# Altium PCB GRLV_double_Rail_v0.3.PcbDoc
Units mil, origin at the board's own origin, x right, y up, seen from the top; angles counter-clockwise.
Board outline 6470 x 7260 mil, 2 copper layers (Top Layer, Bottom Layer); 173 components, 86 nets, 452 pads, 6 vias.
Unrouted connection lines stored in the file: 2.
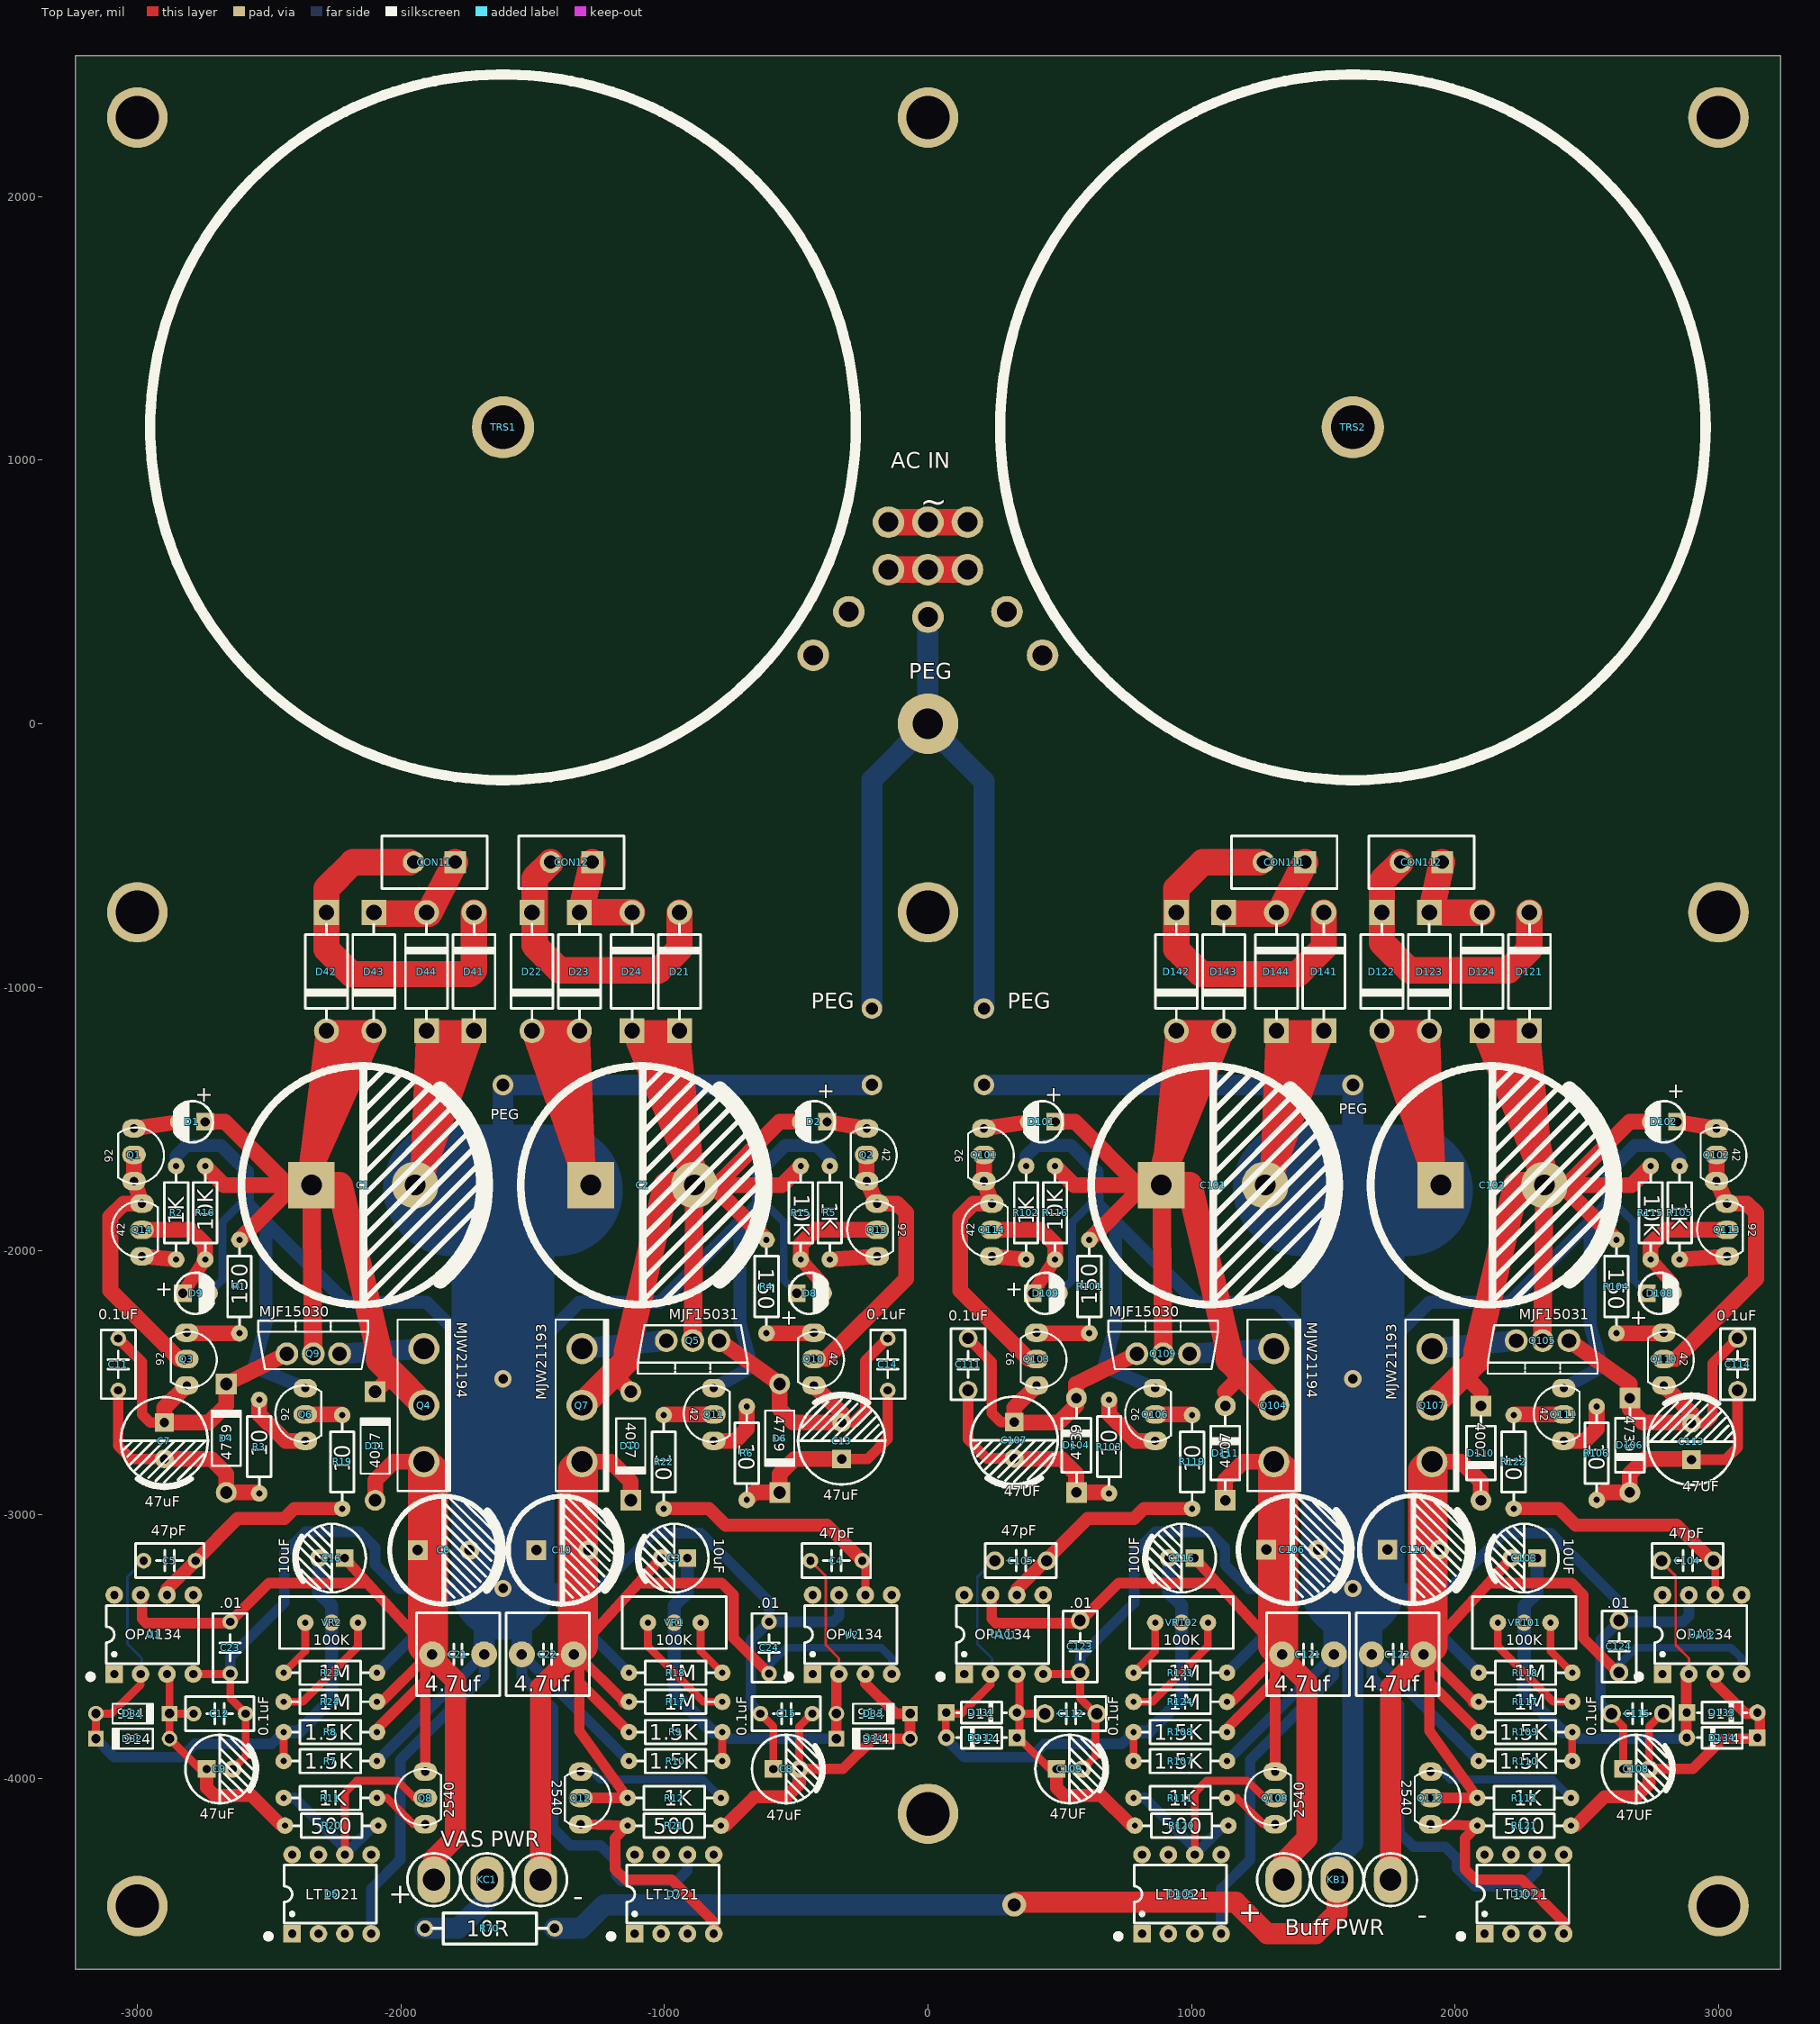
[diagram p0: Top Layer view]
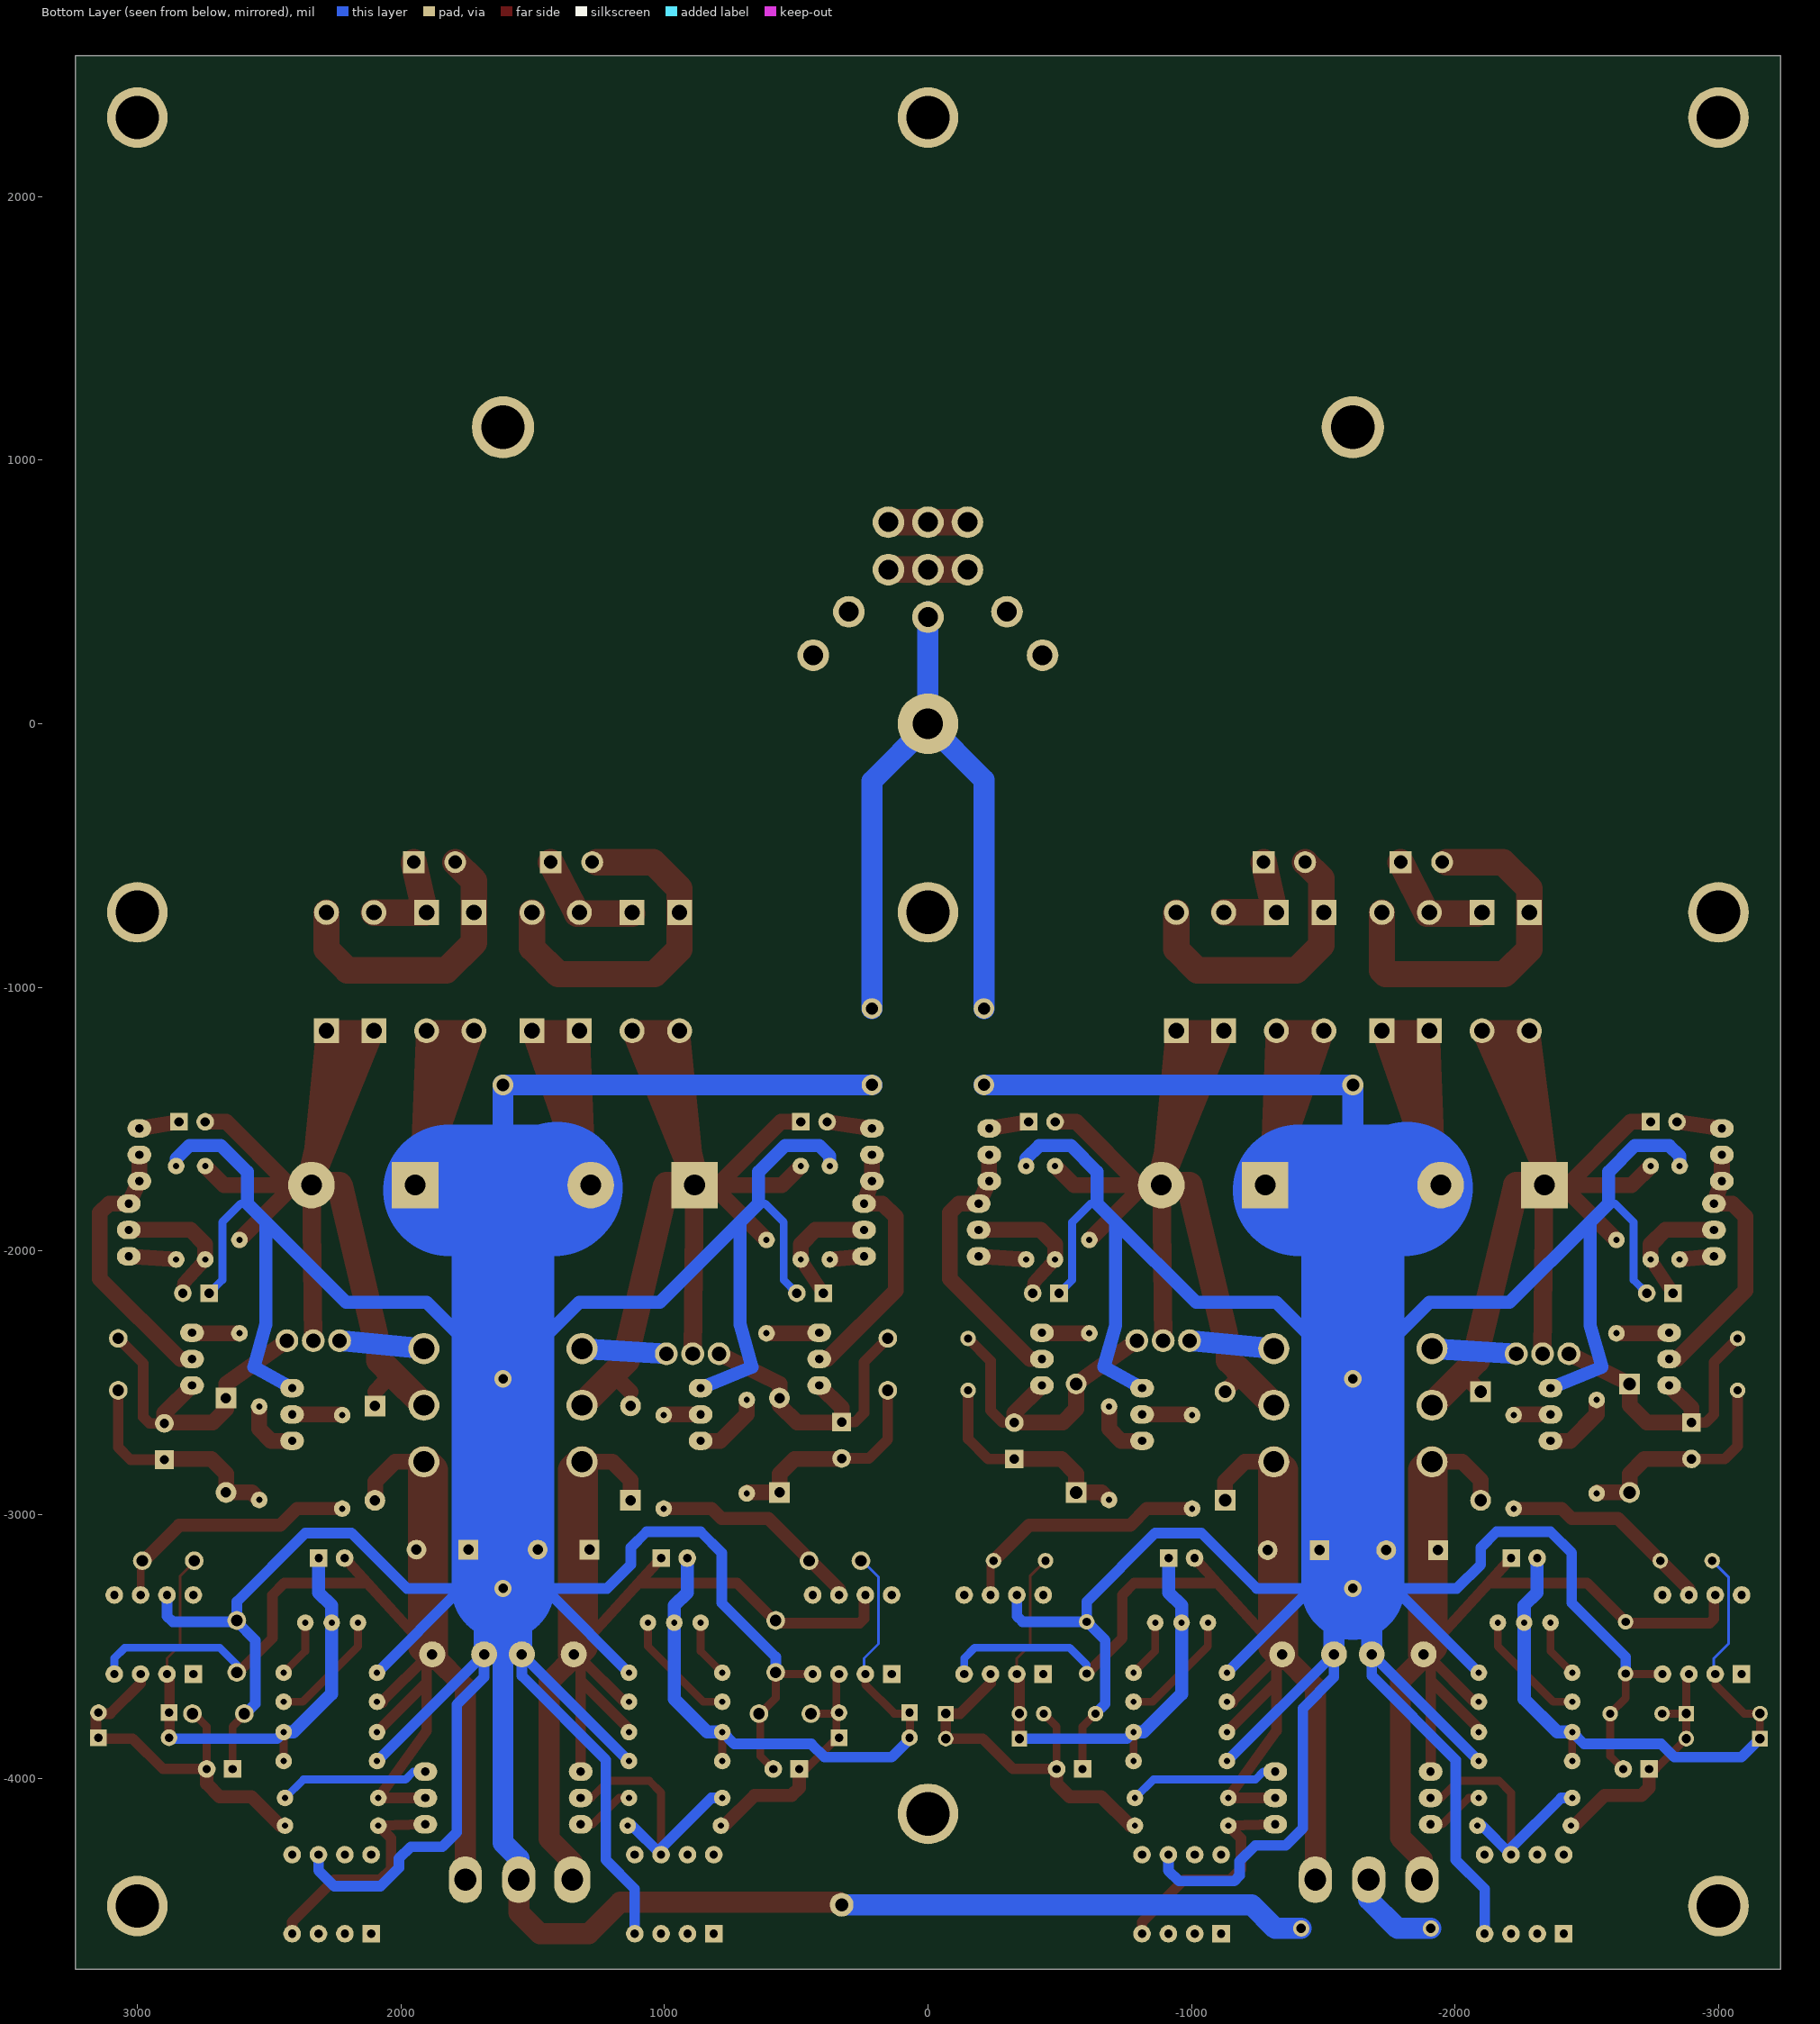
[diagram p1: Bottom Layer view, seen from below]
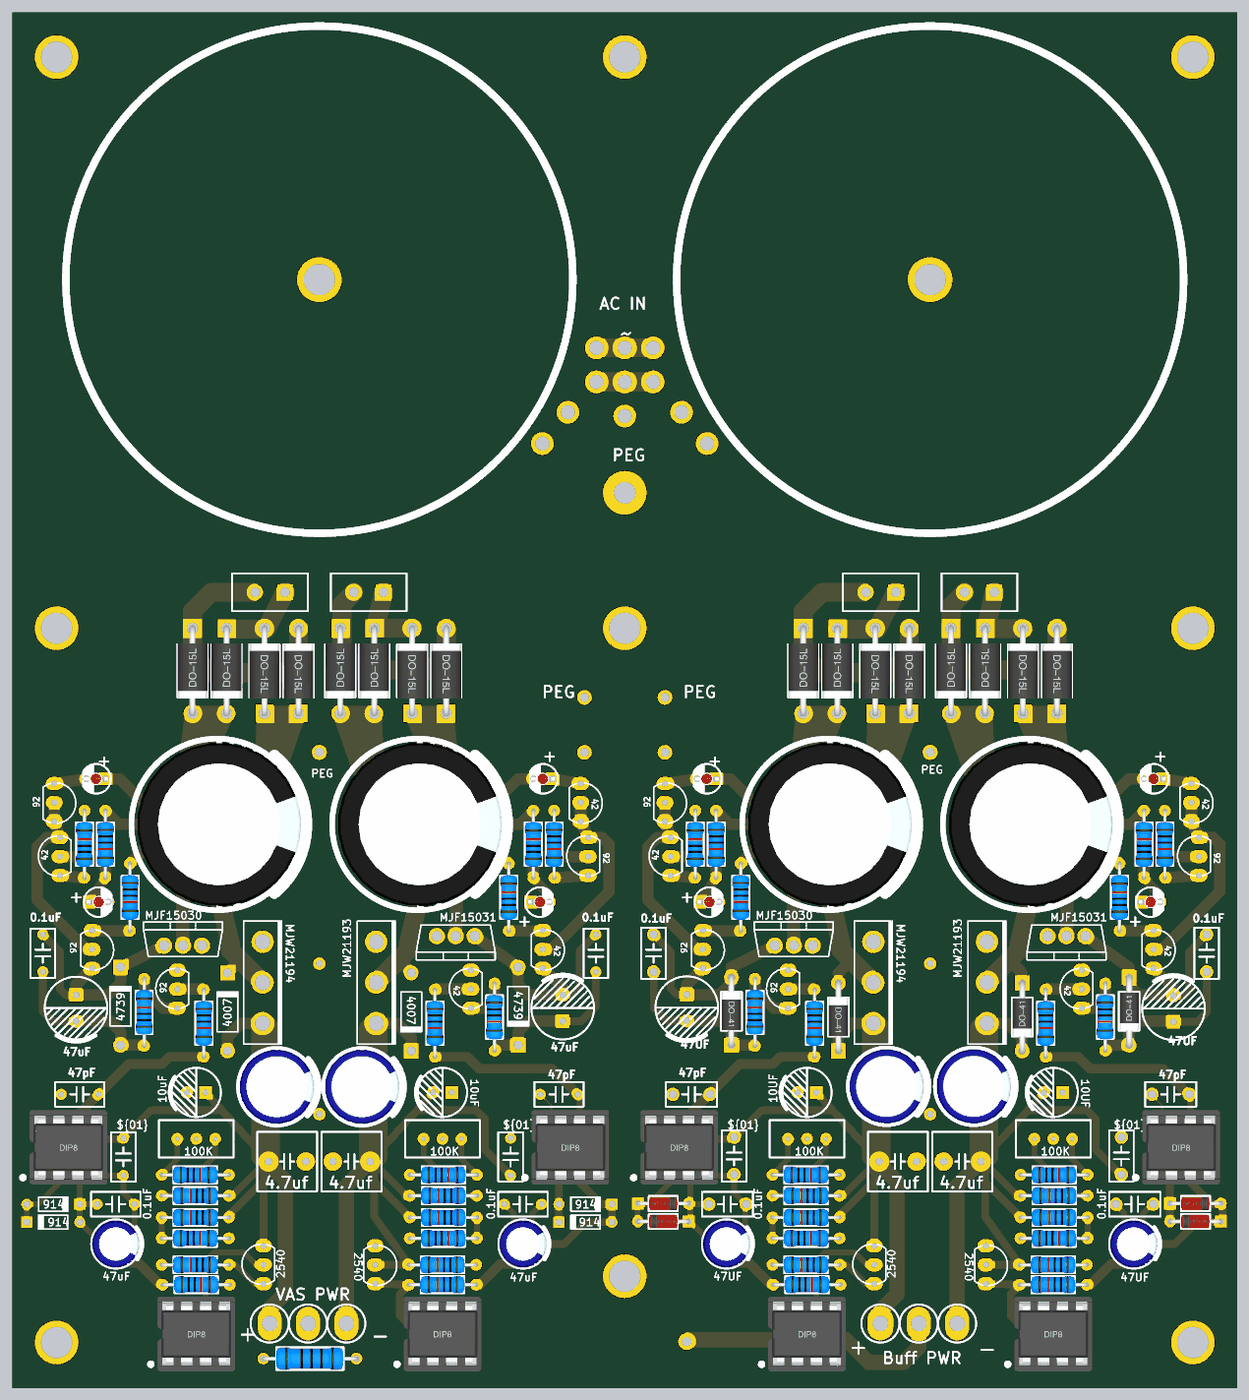
[diagram p2: 3D render of the assembled board from above, using the file's embedded part models]

## Layer stack, top to bottom
Top Solder: solder mask 0.4, Solder Resist, Dk 3.5
Top Layer: signal copper 2.8
Dielectric 1: dielectric 12.6, FR-4, Dk 4.8
Bottom Layer: signal copper 2.8
Bottom Solder: solder mask 0.4, Solder Resist, Dk 3.5

## Board outline
-3235,-4725 -3235,2535 3235,2535 3235,-4725

## Design rules (kind name [scope] priority, off if disabled: settings)
Clearance [All] p1: gap=10 ignorepadtopadclearanceinfootprint=FALSE except(0: Arc-Hole Track-Hole SMDPad-Hole THPad-Hole Via-Hole Fill-Hole Poly-Hole Region-Hole Text-Hole)
PlaneClearance [All] p1: clearance=30
PlaneConnect [All] p1: planeconnectstyle=Relief reliefexpansion=20 reliefentries=4 reliefconductorwidth=20 reliefairgap=30
PolygonConnect [All] p1: thpad.connectstyle=Relief thpad.reliefconductorwidth=20 thpad.reliefentries=4 thpad.polygonreliefangle="45 Angle" thpad.airgapwidth=20 smdpad.connectstyle=Relief smdpad.reliefconductorwidth=20 smdpad.reliefentries=4 smdpad.polygonreliefangle="90 Angle" smdpad.airgapwidth=20 via.connectstyle=Relief via.reliefconductorwidth=20 via.reliefentries=4 via.polygonreliefangle="45 Angle" via.airgapwidth=20
RoomDefinition GRLV_double_Rail_v0.3_P1 [InComponentClass('GRLV_double_Rail_v0.3_P1')] p1: confinementstyle=ConfineIn formatcopy=TRUE lockcomponents=FALSE outline -3197.5,-4720 -27.5,-4720 -27.5,-400 -3197.5,-400
RoomDefinition GRLV_double_Rail_v0.3_P2 [InComponentClass('GRLV_double_Rail_v0.3_P2')] p2: confinementstyle=ConfineIn formatcopy=TRUE lockcomponents=FALSE outline 27.5,-4720 3197.5,-4720 3197.5,-400 27.5,-400
RoutingVias [All] p1: holewidth=28 width=50 viastyle="Through Hole" minholewidth=28 minwidth=50 maxholewidth=28 maxwidth=50
SolderMaskExpansion [All] p1: expansion=4
Width [All] p1: maxlimit=700 minlimit=10 preferedwidth=80
28 further rules are at their usual default settings.

## Classes and differential pairs
component class GRLV_double_Rail_v0.3_P1: C1 C2 C3 C4 C5 C6 C7 C8 C9 C10 C11 C12 C13 C14 C15 C16 C21 C22 C23 C24 CON11 CON12 D1 D2 D4 D5 D6 D7 D8 D9 D10 D11 D21 D22 D23 D24 D31 D32 D33 D34 D41 D42 D43 D44 KC1 Q1 Q2 Q3 Q4 Q5 Q6 Q7 Q8 Q9 Q10 Q11 Q12 Q13 Q14 R1 R2 R3 R4 R5 R6 R7 R8 R9 R10 R11 R12 R15 R16 R17 R18 R19 R20 R21 R22 R23 R24 R70 TRS1 U1 U2 VR1 VR2
component class GRLV_double_Rail_v0.3_P2: C101 C102 C103 C104 C105 C106 C107 C108 C109 C110 C111 C112 C113 C114 C115 C116 C121 C122 C123 C124 CON111 CON112 D101 D102 D104 D105 D106 D107 D108 D109 D110 D111 D121 D122 D123 D124 D131 D132 D133 D134 D141 D142 D143 D144 KB1 Q101 Q102 Q103 Q104 Q105 Q106 Q107 Q108 Q109 Q110 Q111 Q112 Q113 Q114 R101 R102 R103 R104 R105 R106 R107 R108 R109 R110 R111 R112 R115 R116 R117 R118 R119 R120 R121 R122 R123 R124 TRS2 U101 U102 VR101 VR102

## Components (designator, comment, footprint, x,y, rotation, side; value= is the part's Value field where it differs from the comment)
C1 "4700UF/35V" "CAP 10*22*31.5 - BK" -2142.5,-1750 r0 top
C2 "4700UF/35V" "CAP 10*22*31.5 - BK" -1082.5,-1750 r0 top
C3 "10uF" "CAP 2.5*6.3*7" -962.5,-3165 r180 top
C4 "47pF" "CBB 6.3*6.3*5"#1 -347.5,-3175 r180 top
C5 "47pF" "CBB 6.3*6.3*5"#1 -2877.5,-3175 r180 top
C6 "220UF/35V" "CAP 5.0*10*12.5" -1837.5,-3135 r0 top
C7 "47uF" "CAP 3.5*8*11.5" -2897.5,-2720 r270 top
C8 "47uF" "CAP 2.5*6.3*11.2" -537.5,-3965 r0 top
C9 "47uF" "CAP 2.5*6.3*11.2" -2687.5,-3965 r0 top
C10 "220UF/35V" "CAP 5.0*10*12.5" -1387.5,-3135 r0 top
C11 "0.1uF" "CBB 6.3*6.3*5"#1 -3072.5,-2430 r270 top
C12 "0.1uF" "CBB 6.3*6.3*5"#1 -2687.5,-3755 r0 top
C13 "47uF" "CAP 3.5*8*11.5" -327.5,-2720 r90 top
C14 "0.1uF" "CBB 6.3*6.3*5"#1 -152.5,-2430 r90 top
C15 "0.1uF" "CBB 6.3*6.3*5"#1 -537.5,-3755 r180 top
C16 "10uF" "CAP 2.5*6.3*7" -2262.5,-3165 r180 top
C21 "4.7uf" "CBB 7.2*7.2*13" -1782.5,-3530 r0 top
C22 "4.7uf" "CBB 7.2*7.2*13" -1442.5,-3530 r0 top
C23 ".01" "CBB 6.3*6.3*5"#1 -2647.5,-3505 r90 top value=0.01uF
C24 ".01" "CBB 6.3*6.3*5"#1 -602.5,-3505 r270 top value=0.01uF
C101 "4700UF/35V" "CAP 10*22*31.5 - BK" 1082.5,-1750 r0 top
C102 "4700UF/35V" "CAP 10*22*31.5 - BK" 2142.5,-1750 r0 top
C103 "10UF" "CAP 2.5*6.3*7" 2262.5,-3165 r180 top
C104 "47pF" "CBB 6.3*6.3*5"#2 2882.5,-3175 r180 top
C105 "47pF" "CBB 6.3*6.3*5"#2 352.5,-3175 r180 top
C106 "220UF/35V" "CAP 5.0*10*12.5" 1382.5,-3132.83 r0 top
C107 "47UF" "CAP 3.5*8*11.5" 327.5,-2717.83 r270 top
C108 "47UF" "CAP 2.5*6.3*11.2" 2687.5,-3965 r0 top
C109 "47UF" "CAP 2.5*6.3*11.2" 537.5,-3965 r0 top
C110 "220UF/35V" "CAP 5.0*10*12.5" 1842.5,-3132.83 r0 top
C111 "0.1uF" "CBB 6.3*6.3*5"#2 152.5,-2430 r270 top
C112 "0.1uF" "CBB 6.3*6.3*5"#2 542.5,-3755 r0 top
C113 "47UF" "CAP 3.5*8*11.5" 2897.5,-2722.83 r90 top
C114 "0.1uF" "CBB 6.3*6.3*5"#2 3072.5,-2430 r90 top
C115 "0.1uF" "CBB 6.3*6.3*5"#2 2692.5,-3755 r180 top
C116 "10UF" "CAP 2.5*6.3*7" 962.5,-3165 r180 top
C121 "4.7uf" "CBB 7.2*7.2*13" 1442.5,-3530 r0 top
C122 "4.7uf" "CBB 7.2*7.2*13" 1782.5,-3530 r0 top
C123 ".01" "CBB 6.3*6.3*5"#2 577.5,-3500 r90 top value=0.01uF
C124 ".01" "CBB 6.3*6.3*5"#2 2622.5,-3500 r270 top value=0.01uF
CON11 "AC220-2" HX4.0-2XS -1872.5,-525 r180 top
CON12 "AC220-2" HX4.0-2XS -1352.5,-525 r180 top
CON111 "AC220-2" HX4.0-2XS 1352.5,-525 r180 top
CON112 "AC220-2" HX4.0-2XS 1872.5,-525 r180 top
D1 "+" "LED 3MM-R" -2792.5,-1510 r180 top
D2 "+" "LED 3MM-R" -432.5,-1510 r180 top
D4 "4739" DO-41#1 -2662.5,-2710 r90 top
D5 "LT1021" DIP8-300_MH -2262.5,-4440 r90 top
D6 "4739" DO-41#1 -562.5,-2710 r270 top
D7 "LT1021" DIP8-300_MH -962.5,-4440 r90 top
D8 "+" "LED 3MM-R" -447.5,-2160 r0 top
D9 "+" "LED 3MM-R" -2777.5,-2160 r0 top
D10 "4007" DO-41#1 -1127.5,-2740 r270 top
D11 "4007" DO-41#1 -2097.5,-2740 r90 top
D21 "VS-HFA08TB60-M3" DO-15XL -942.5,-940 r90 top
D22 "VS-HFA08TB60-M3" DO-15XL -1502.5,-940 r270 top
D23 "VS-HFA08TB60-M3" DO-15XL -1322.5,-940 r270 top
D24 "VS-HFA08TB60-M3" DO-15XL -1122.5,-940 r90 top
D31 "914" DO-35#1 -3017.5,-3755 r0 top
D32 "914" DO-35#1 -3017.5,-3850 r180 top
D33 "914" DO-35#1 -207.5,-3755 r0 top
D34 "914" DO-35#1 -207.5,-3850 r180 top
D41 "VS-HFA08TB60-M3" DO-15XL -1722.5,-940 r90 top
D42 "VS-HFA08TB60-M3" DO-15XL -2282.5,-940 r270 top
D43 "VS-HFA08TB60-M3" DO-15XL -2102.5,-940 r270 top
D44 "VS-HFA08TB60-M3" DO-15XL -1902.5,-940 r90 top
D101 "+" "LED 3MM-R" 432.5,-1510 r180 top
D102 "+" "LED 3MM-R" 2792.5,-1510 r180 top
D104 "4739" DO-41#2 563.44,-2736.77 r90 top
D105 "LT1021" DIP8-300_MH 962.5,-4440 r90 top
D106 "4739" DO-41#2 2663.44,-2736.77 r270 top
D107 "LT1021" DIP8-300_MH 2262.5,-4440 r90 top
D108 "+" "LED 3MM-R" 2777.5,-2160 r0 top
D109 "+" "LED 3MM-R" 447.5,-2160 r0 top
D110 "4007" DO-41#2 2098.44,-2766.77 r270 top
D111 "4007" DO-41#2 1128.44,-2766.77 r90 top
D121 "VS-HFA08TB60-M3" DO-15XL 2282.5,-940 r90 top
D122 "VS-HFA08TB60-M3" DO-15XL 1722.5,-940 r270 top
D123 "VS-HFA08TB60-M3" DO-15XL 1902.5,-940 r270 top
D124 "VS-HFA08TB60-M3" DO-15XL 2102.5,-940 r90 top
D131 "914" DO-35#2 203.56,-3751.34 r0 top
D132 "914" DO-35#2 203.56,-3846.34 r180 top
D133 "914" DO-35#2 3013.56,-3751.34 r0 top
D134 "914" DO-35#2 3013.56,-3846.34 r180 top
D141 "VS-HFA08TB60-M3" DO-15XL 1502.5,-940 r90 top
D142 "VS-HFA08TB60-M3" DO-15XL 942.5,-940 r270 top
D143 "VS-HFA08TB60-M3" DO-15XL 1122.5,-940 r270 top
D144 "VS-HFA08TB60-M3" DO-15XL 1322.5,-940 r90 top
KB1 "KCBuff_PowerPin" KCBuff_PowerPin_M2.0 1552.5,-4385 r90 top
KC1 "KCInputVas_PowerPin" KCIn_VAS_PowerPin_M2.0 -1672.5,-4385 r90 top
Q1 "92" TO92A -3012.5,-1535 r0 top
Q2 "42" TO92A -232.5,-1535 r0 top
Q3 "92" TO92A -2812.5,-2310 r0 top
Q4 "MJW21194" TO247V#1 -1912.5,-2370 r270 top
Q5 "MJF15031" TO220V -792.5,-2340 r180 top
Q6 "92" TO92A -2362.5,-2720 r180 top
Q7 "MJW21193" TO247V#1 -1312.5,-2370 r270 top
Q8 "2540" TO92A -1907.5,-4175 r180 top
Q9 "MJF15030" TO220V -2432.5,-2390 r0 top
Q10 "42" TO92A -432.5,-2310 r0 top
Q11 "42" TO92A -812.5,-2720 r180 top
Q12 "2540" TO92A -1317.5,-3975 r0 top
Q13 "92" TO92A -192.5,-2020 r180 top
Q14 "42" TO92A -2982.5,-2020 r180 top
Q101 "92" TO92A 212.5,-1535 r0 top
Q102 "42" TO92A 2992.5,-1535 r0 top
Q103 "92" TO92A 412.5,-2310 r0 top
Q104 "MJW21194" TO247V#2 1312.5,-2585 r270 top
Q105 "MJF15031" TO220V 2432.5,-2340 r180 top
Q106 "92" TO92A 862.5,-2720 r180 top
Q107 "MJW21193" TO247V#2 1912.5,-2585 r270 top
Q108 "2540" TO92A 1317.5,-4175 r180 top
Q109 "MJF15030" TO220V 792.5,-2390 r0 top
Q110 "42" TO92A 2792.5,-2310 r0 top
Q111 "42" TO92A 2412.5,-2720 r180 top
Q112 "2540" TO92A 1907.5,-3975 r0 top
Q113 "92" TO92A 3032.5,-2020 r180 top
Q114 "42" TO92A 242.5,-2020 r180 top
R1 "150" "RS 1/4W" -2612.5,-2135 r270 top
R2 "1K" "RS 1/4W" -2852.5,-1855 r90 top
R3 "10" "RS 1/4W" -2537.5,-2742.17 r90 top
R4 "150" "RS 1/4W" -612.5,-2135 r90 top
R5 "1K" "RS 1/4W" -372.5,-1855 r270 top
R6 "10" "RS 1/4W" -687.5,-2767.17 r270 top
R7 "1.5K" "RS 1/4W" -2267.5,-3935 r0 top
R8 "1.5K" "RS 1/4W" -2267.5,-3825 r180 top
R9 "1.5K" "RS 1/4W" -957.5,-3825 r180 top
R10 "1.5K" "RS 1/4W" -957.5,-3935 r0 top
R11 "1K" "RS 1/4W" -2267.5,-4075 r180 top
R12 "1K" "RS 1/4W" -962.5,-4075 r180 top
R15 "10K" "RS 1/4W" -482.5,-1855 r90 top
R16 "10K" "RS 1/4W" -2742.5,-1855 r270 top
R17 "1M" "RS 1/4W" -957.5,-3710 r180 top
R18 "1M" "RS 1/4W" -957.5,-3600 r0 top
R19 "10" "RS 1/4W" -2222.5,-2800 r270 top
R20 "500" "RS 1/4W" -2262.5,-4180 r0 top
R21 "500" "RS 1/4W" -962.5,-4180 r180 top
R22 "10" "RS 1/4W" -1002.5,-2800 r270 top
R23 "1M" "RS 1/4W" -2267.5,-3600 r0 top
R24 "1M" "RS 1/4W" -2267.5,-3710 r180 top
R70 "10R" "RS 1/2W" -1662.5,-4570 r180 top
R101 "150" "RS 1/4W" 612.5,-2135 r270 top
R102 "1K" "RS 1/4W" 372.5,-1855 r90 top
R103 "10" "RS 1/4W" 687.5,-2742.17 r90 top
R104 "150" "RS 1/4W" 2612.5,-2135 r90 top
R105 "1K" "RS 1/4W" 2852.5,-1855 r270 top
R106 "10" "RS 1/4W" 2537.5,-2767.17 r270 top
R107 "1.5K" "RS 1/4W" 957.5,-3935 r0 top
R108 "1.5K" "RS 1/4W" 957.5,-3825 r180 top
R109 "1.5K" "RS 1/4W" 2267.5,-3825 r180 top
R110 "1.5K" "RS 1/4W" 2267.5,-3935 r0 top
R111 "1K" "RS 1/4W" 957.5,-4075 r180 top
R112 "1K" "RS 1/4W" 2262.5,-4075 r180 top
R115 "10K" "RS 1/4W" 2742.5,-1855 r90 top
R116 "10K" "RS 1/4W" 482.5,-1855 r270 top
R117 "1M" "RS 1/4W" 2267.5,-3710 r180 top
R118 "1M" "RS 1/4W" 2267.5,-3600 r0 top
R119 "10" "RS 1/4W" 1002.5,-2800 r270 top
R120 "500" "RS 1/4W" 962.5,-4180 r0 top
R121 "500" "RS 1/4W" 2262.5,-4180 r180 top
R122 "10" "RS 1/4W" 2222.5,-2800 r270 top
R123 "1M" "RS 1/4W" 957.5,-3600 r0 top
R124 "1M" "RS 1/4W" 957.5,-3710 r180 top
TRS1 "TRANSFORMER" TRANS_BLOCK_m4_68mm -1612.5,1125 r0 top
TRS2 "TRANSFORMER" TRANS_BLOCK_m4_68mm 1612.5,1125 r0 top
U1 "OPA134" DIP8-300_MH -2937.5,-3455 r90 top
U2 "OPA134" DIP8-300_MH -287.5,-3455 r90 top
U101 "OPA134" DIP8-300_MH 287.5,-3455 r90 top
U102 "OPA134" DIP8-300_MH 2937.5,-3455 r90 top
VR1 "100K" "RS 1/2W-VR" -962.5,-3410 r180 top
VR2 "100K" "RS 1/2W-VR" -2262.5,-3410 r180 top
VR101 "100K" "RS 1/2W-VR" 2262.5,-3410 r180 top
VR102 "100K" "RS 1/2W-VR" 962.5,-3410 r180 top

## Footprints (in the part's own frame and the unit in brackets; to place one, negate y for a bottom-side part, rotate by r counter-clockwise, add the part's x,y. Pads: shape width x height; smd on the part's side, far side on the other; paste and mask are expansions set on the pad)
"CAP 2.5*6.3*7" [mm] "脚距2.5mm直径6.3mm高度7mm"
  rect 1.7x1.7 hole 0.8: 1(-1.25,0)
  round 1.7 hole 0.8: 2(1.25,0)
  silkscreen extent -3.3,-3.3 3.56,3.3, body extent -3.15,-3.15 3.16,3.15, height 7.03
"CAP 2.5*6.3*11.2" [mm] "脚距2.5mm直径6.3mm高度11.2mm"
  rect 1.7x1.7 hole 0.8: 1(-1.25,0)
  round 1.7 hole 0.8: 2(1.25,0)
  silkscreen extent -3.3,-3.3 3.56,3.3, body extent -3.15,-3.15 3.16,3.15, height 11.23
"CAP 3.5*8*11.5" [mm] "脚距3.5mm直径8mm高度11.5mm"
  rect 1.8x1.8 hole 0.9: 1(-1.75,0)
  round 1.8 hole 0.9: 2(1.75,0)
  silkscreen extent -4.2,-4.2 4.5,4.2, body extent -4,-4 4.01,4, height 11.53
"CAP 5.0*10*12.5" [mm] "脚距5mm直径10mm高度12.5mm"
  rect 1.9x1.9 hole 1: 1(-2.5,0)
  round 1.9 hole 1: 2(2.5,0)
  silkscreen extent -5.2,-5.2 5.64,5.2, body extent -5,-5.01 5.01,4.99, height 12.55
"CAP 10*22*31.5 - BK" [mm] "脚距10mm直径22mm高度31.5mm"
  rect 4.5x4.5 hole 2: 1(-5,0)
  round 4.5 hole 2: 2(5,0)
  silkscreen extent -11.74,-11.51 11.74,11.49, body extent -11,-11 11.01,11, height 31.54
"CBB 6.3*6.3*5"#1 [mm] "脚距5mm高6.3mm厚3mm"
  round 1.5 hole 0.8: 1(-2.5,0) 2(2.5,0)
  silkscreen extent -3.3,-1.65 3.3,1.65, body extent -3.15,-1.5 3.15,1.5, height 6.8
"CBB 6.3*6.3*5"#2 [mm] "脚距5mm高6.3mm厚3mm"
  round 1.8 hole 1.1: 1(-2.5,0) 2(2.5,0)
  silkscreen extent -3.43,-1.65 3.43,1.65, body extent -3.15,-1.5 3.15,1.5, height 6.8
"CBB 7.2*7.2*13" [mm] "脚距5mm高13mm厚7.2mm"
  round 2.5 hole 1: 1(-2.5,0) 2(2.5,0)
  silkscreen extent -4,-4 4,4, body extent -4,-4 4,4, height 17.53
DIP8-300_MH [mm] "带底座 9.4*7.6*3.8(长宽高）"
  rect 1.7x1.7 hole 0.8: 1(-3.81,3.81)
  round 1.7 hole 0.8: 2(-3.81,1.27) 3(-3.81,-1.27) 4(-3.81,-3.81) 5(3.81,-3.81) 6(3.81,-1.27) 7(3.81,1.27) 8(3.81,3.81)
  silkscreen extent -4.32,-4.32 2.79,6.35, body extent -5,-5.19 5,5.19, height 7.7
DO-15XL [mm] "4*11.4mm(直径，脚距）1.5孔径"
  rect 2.4x2.4 hole 1.5: 1(-5.7,0)
  round 2.4 hole 1.5: 2(5.7,0)
  silkscreen extent -4.57,-2.03 4.57,2.03, body extent -6.1,-2 6.1,2, height 4.05
DO-35#1 [mm] "Diode, Axial; Body 3.8 x 1.9 mm (LxDia. max), Lead Dia. 0.53 mm (max)"
  round 1.5 hole 0.9: 1(-3.55,0)
  rect 1.5x1.5 hole 0.9: 2(3.55,0)
  silkscreen extent -1.95,-0.95 2.05,0.95
DO-35#2 [mm] "1.8*6.8mm(直径，脚距）"
  rect 1.6x1.6 hole 0.8: 1(-3.4,0)
  round 1.6 hole 0.8: 2(3.4,0)
  silkscreen extent -2.41,-1.02 2.41,1.02, body extent -3.65,-0.9 3.65,0.9, height 1.85
DO-41#1 [mm] "Diode, Axial; Body 5.2 x 2.7 mm (LxDia. max), Lead Dia. 0.86 mm (max)"
  round 2 hole 1.2: 1(-5.23,0)
  rect 2x2 hole 1.2: 2(5.23,0)
  silkscreen extent -2.65,-1.4 2.75,1.4
DO-41#2 [mm] "2.6*9.1mm(直径，脚距）"
  rect 2x2 hole 1: 1(-4.55,0)
  round 2 hole 1: 2(4.55,0)
  silkscreen extent -3.56,-1.4 3.56,1.4, body extent -4.92,-1.29 4.98,1.31, height 2.65
HX4.0-2XS [mm]
  rect 2.1x2.1 hole 1.3: 1(-2,0)
  round 2.1 hole 1.3: 2(2,0)
  silkscreen extent -5.08,-2.54 5.08,2.54
KCBuff_PowerPin_M2.0 [mm]
  oval 4.5x3.5 hole 2.1: 1(0,5.15)
  oval 4.5x3.2 hole 2.1: 2(0,-5.15) 3(0,0)
  silkscreen extent -2.55,-7.7 2.55,7.7
KCIn_VAS_PowerPin_M2.0 [mm]
  oval 4.5x3.2 hole 2.1: 1(0,5.143) 2(0,-5.143) 3(0,0)
  silkscreen extent -2.55,-7.69 2.55,7.69
"LED 3MM-R" [mm] "红色3mm直插LED"
  rect 1.7x1.7 hole 0.9: 1(-1.27,0)
  round 1.7 hole 0.9: 2(1.27,0)
  silkscreen extent -2.01,-2 1.72,1.98, body extent -1.95,-1.95 1.64,1.95, height 5.55
"RS 1/2W" [mil] "直插色环电阻，脚距12.5mm，直径3mm"
  round 62 hole 35.43: 1(-246.06,0) 2(246.06,0)
  silkscreen extent -217,-59 217,59, body extent -256,-59 256,59, height 122
"RS 1/2W-VR" [mm] "直插3脚顶调可调电阻，脚距2.54mm，长10mm*宽5mm*高10mm"
  round 1.6 hole 0.6: 1(-2.54,0) 2(2.54,0) 3(0,0)
  silkscreen extent -5,-2.5 5,2.5
"RS 1/4W" [mm] "直插色环电阻，脚距9mm，直径2.3mm"
  round 1.6 hole 0.6: 1(-4.5,0) 2(4.5,0)
  silkscreen extent -3.68,-1.14 3.68,1.14, body extent -4.72,-1.16 4.73,1.16, height 2.32
TO92A [mil]
  oval 90x70 hole 31.5: 1(0,0) 2(0,-100) 3(0,-200)
  silkscreen extent -60,-209 114,4
TO220V [mm]
  round 2.2 hole 1.397: 1(0,0) 2(2.54,0) 3(5.08,0)
  silkscreen extent -2.75,-1.48 7.83,3.18
TO247V#1 [mm]
  round 3 hole 2.032: 1(0,0) 2(5.461,0) 3(10.922,0)
  silkscreen extent -2.79,-2.54 13.72,2.54
TO247V#2 [mm]
  round 3 hole 2.032: 1(-5.461,0) 2(0,0) 3(5.461,0)
  silkscreen extent -8.25,-2.54 8.25,2.54
TRANS_BLOCK_m4_68mm [mm] "Transformer 4.0mm screw  68mm Diameter"
  round 6 hole 4.2: 1(0,0)
  silkscreen extent -34,-34 34,34

## Part data
C1 C2 C3 C6 C7 C8 C9 C10 C13 C16 C101 C102 C103 C106 C107 C108 C109 C110 C113 C116: library part C-CAP, "直插电解电容", BOM名称=直插电解电容, 学习资源=www.ooocke.com, 版权归属=源创客
C4 C5 C11 C12 C14 C15 C23 C24 C104 C105 C111 C112 C114 C115 C123 C124: library part C-CBB, "CBB电容", BOM名称=CBB电容, 学习资源=www.ooocke.com, 版权归属=源创客
C21 C22 C121 C122: library part C-MKS, "MKS薄膜电容"
D1 D2 D8 D9 D101 D102 D108 D109: library part LED, "直插式LED"
D4 D6 D104 D106: library part 1N4739, "9.1V/1W稳压管"
D5 D7 D105 D107: library part LT1021-10-2P, "10V Precision Reference 2 Pin Config"
D10 D11 D110 D111: library part 1N4007, "整流二极管", BOM名称=整流二极管, 学习资源=www.ooocke.com, 版权归属=源创客
D21 D22 D23 D24 D41 D42 D43 D44 D121 D122 D123 D124 D141 D142 D143 D144: "Ultrafast Soft Recovery Diado 8A 600V"
D31 D32 D33 D34 D131 D132 D133 D134: library part 1N914, "高速开关管 1V/0.25W"
KB1: "King Cello Buffer Stage"
KC1: "King Cello Input Stage and VAS"
Q1 Q3 Q6 Q13 Q101 Q103 Q106 Q113: library part KSP92/93, "High Voltage PNP Transistor"
Q2 Q10 Q11 Q14 Q102 Q110 Q111 Q114: library part KSP42/43, "High Voltage NPN Transistor"
Q4 Q9 Q104 Q109: "Power NPN Transistor"
Q5 Q7 Q105 Q107: "Power PNP Transistor"
Q8 Q12 Q108 Q112: library part DN2540, "N沟道耗尽型DMOS场效应管 400V/150ma"
R1 R2 R3 R4 R5 R6 R7 R8 R9 R10 R11 R12 R15 R16 R17 R18 R19 R20 R21 R22 R23 R24 R70 R101 R102 R103 R104 R105 R106 R107 R108 R109 R110 R111 R112 R115 R116 R117 R118 R119 R120 R121 R122 R123 R124: library part R-CRR, "直插色环电阻", BOM名称=色环电阻, 学习资源=www.ooocke.com, 版权归属=源创客
TRS1 TRS2: "Transformer"
U1 U2 U101 U102: library part OPA134PA
VR1 VR2 VR101 VR102: library part VR-W, "直插可调电阻-顶调"

## Free pads (board coordinates)
  round 230 hole 165: 2(-3000,-4485) 2(-3000,-715) 2(-3000,2300) 2(0,-4135) 2(0,-715) 2(0,2300) 2(3000,-4485) 2(3000,-715) 2(3000,2300)
  round 230 hole 115: 2(0,0)
  round 90 hole 50: 2(327.5,-4480)
  round 120 hole 75: 3(-150,585) 3(-150,765) 4(0,585) 4(0,765) 5(150,585) 5(150,765) 6(-435,260) 6(-300,425) 6(0,405) 6(300,425) 6(435,260)
  round 78 hole 46: 7(212.5,-1080) 8(-212.5,-1080) 9(-212.5,-1370) 10(212.5,-1370)

## Via types
v1: diameter 66, hole 36, Top Layer to Bottom Layer, 4 vias
v2: diameter 80, hole 48, Top Layer to Bottom Layer, 2 vias

## Nets (pads, with @x,y where several pads share a name; then routed paths per layer and width w, separated by ;. In a path a pad name is that pad's centre, name@x,y a point inside that pad or via, vN(x,y) a via of type N, cw(c..) or ccw(c..) an arc to the next point about the centre after c; other vN are vias at no path point)
GND: C1.2 C2.1 C6.2 C8.1 C9.2 C10.1 C12.2 C15.2 C21.2 C22.1 C23.1 C24.1 C101.2 C102.1 C106.2 C108.1 C109.2 C110.1 C112.2 C115.2 C121.2 C122.1 C123.1 C124.1 D5.4 D7.6 D8.1 D9.2 D22.2 D23.2 D41.1 D44.1 D105.4 D107.6 D108.1 D109.2 D122.2 D123.2 D141.1 D144.1 KB1.3 pad.2@0,0 pad.2@327.5,-4480 pad.6@0,405 pad.7 pad.8 pad.9 pad.10 Q6.3 Q11.3 Q106.3 Q111.3 R2.2 R5.1 R7.2 R10.1 R18.1 R23.2 R70.1 R102.2 R105.1 R107.2 R110.1 R118.1 R123.2 U1.4 U2.7 U101.4 U102.7 | length 55732.8
  Top Layer w30: U1.4 -2649.07,-3605 C23.1 -2647.5,-3696.57 C12.2 -2589.07,-3915.79 C9.2 ; C15.2 -586.71,-3804.21 C8.1 ; U101.4 575.93,-3605 577.5,-3603.43 577.5,-3696.57 635.93,-3755 635.93,-3915.79 C109.2 ; C115.2@2589.07,-3755 2638.29,-3804.21 C108.1
  Top Layer w80: pad.2@327.5,-4480 337.5,-4470 1167.5,-4470 1287.5,-4590 1472.5,-4590 1552.5,-4510 KB1.3 ; C1.2@-1925.96,-1750 -1855.69,-1170.08 -1855,-1164.41 ; C1.2@-1925.96,-1750 -1790,-1164.41 ; C1.2@-1925.96,-1750 D41.1 -1790,-1164.41 ; C1.2@-1925.96,-1750 D44.1 -1855,-1164.41 ; -1855,-1164.41 -1790,-1164.41 ; -1455,-1164.41 -1395,-1164.41 ; -1455,-1164.41 D22.2 C2.1@-1299.04,-1750 ; -1455,-1164.41 C2.1@-1299.04,-1750 ; -1395,-1164.41 -1393.1,-1175.98 C2.1@-1299.04,-1750 ; -1395,-1164.41 D23.2 C2.1@-1299.04,-1750 ; C101.2@1299.04,-1750 1364.47,-1169.14 D144.1@1365,-1164.41 ; C101.2@1299.04,-1750 1430,-1164.41 ; C101.2@1299.04,-1750 D141.1 1430,-1164.41 ; C101.2@1299.04,-1750 D144.1 D144.1@1365,-1164.41 ; D144.1@1365,-1164.41 1430,-1164.41 ; 1775,-1164.41 1845,-1164.41 ; 1775,-1164.41 D122.2 C102.1@1925.96,-1750 ; 1775,-1164.41 C102.1@1925.96,-1750 ; 1845,-1164.41 D123.2 C102.1@1925.96,-1750 ; 1845,-1164.41 1846.08,-1172.21 C102.1@1925.96,-1750
  Bottom Layer w30: D9.2 -2677.5,-2110 -2677.5,-1890 -2607.5,-1820 -2582.5,-1820 ; C23.1 C23.1@-2640.65,-3603.43 ; -642.5,-1820 -617.5,-1820 -547.5,-1890 -547.5,-2110 D8.1 ; D109.2 547.5,-2110 547.5,-1890 617.5,-1820 642.5,-1820 ; C123.1@577.5,-3603.43 C123.1@584.35,-3603.43 ; 2582.5,-1820 2607.5,-1820 2677.5,-1890 2677.5,-2110 D108.1
  Bottom Layer w40: C23.1 -2647.5,-3540 -2442.5,-3335 -2442.5,-3145 -2362.5,-3065 -2157.5,-3065 -2097.5,-3125 -2097.5,-3190 -2007.5,-3280 -1797.5,-3280 ; D5.4 -2112.5,-4420 -2002.5,-4310 -2002.5,-3930 -1684.07,-3611.57 C21.2 -1685.33,-3530 R7.2 ; R23.2 -1797.5,-3307.17 -1797.5,-3280 ; R10.1 -1539.67,-3530 C22.1 -1540.93,-3616.57 -1422.5,-3735 -1422.5,-4190 -1357.5,-4255 -1242.5,-4255 -1182.5,-4315 -1182.5,-4370 -1162.5,-4390 -952.5,-4390 -912.5,-4350 D7.6 ; R18.1 -1454.67,-3280 ; C15.2 -672.5,-3718.43 -672.5,-3476.57 C24.1 ; U2.7 -337.5,-3385 -359.07,-3406.57 C24.1 ; C123.1@577.5,-3603.43 C123.1 577.5,-3540 782.5,-3335 782.5,-3145 862.5,-3065 1067.5,-3065 1127.5,-3125 1127.5,-3190 1217.5,-3280 1427.5,-3280 ; D105.4 1112.5,-4420 1222.5,-4310 1222.5,-3930 1540.93,-3611.57 C121.2 1539.67,-3530 R107.2 ; R123.2 1427.5,-3307.17 1427.5,-3280 ; R110.1 1685.33,-3530 C122.1 1684.07,-3616.57 1787.5,-3720 1787.5,-4205 1842.5,-4260 1962.5,-4260 2007.5,-4305 2007.5,-4340 2077.5,-4410 2252.5,-4410 2312.5,-4350 D107.6 ; R118.1 1770.33,-3280 ; C115.2@2589.07,-3755 2552.5,-3718.43 2552.5,-3476.57 C124.1@2622.5,-3406.57 ; U102.7 2887.5,-3385 2865.93,-3406.57 C124.1@2622.5,-3406.57 ; -1797.5,-3280 v1(-1612.5,-3280) -1454.67,-3280 ; -1454.67,-3280 -1247.5,-3280 -1037.5,-3070 -862.5,-3070 -602.5,-3330 C24.1 ; 1427.5,-3280 v1(1612.5,-3280) 1770.33,-3280 ; 1770.33,-3280 1977.5,-3280 2187.5,-3070 2362.5,-3070 2622.5,-3330 C124.1 C124.1@2622.5,-3406.57
  Bottom Layer w50: R2.2 -2852.5,-1640 -2812.5,-1600 -2682.5,-1600 -2582.5,-1700 -2582.5,-1820 -2512.5,-1890 ; Q6.3 -2557.5,-2440 -2512.5,-2280 -2512.5,-1890 ; Q11.3 -667.5,-2440 -712.5,-2280 -712.5,-1890 ; R5.1 -372.5,-1650 -422.5,-1600 -542.5,-1600 -642.5,-1700 -642.5,-1820 -712.5,-1890 ; R102.2 372.5,-1640 412.5,-1600 542.5,-1600 642.5,-1700 642.5,-1820 712.5,-1890 ; Q106.3 667.5,-2440 712.5,-2280 712.5,-1890 ; Q111.3 2557.5,-2440 2512.5,-2280 2512.5,-1890 ; R105.1 2852.5,-1650 2802.5,-1600 2682.5,-1600 2582.5,-1700 2582.5,-1820 2512.5,-1890 ; -2512.5,-1890 -2207.5,-2195 -1902.5,-2195 v1(-1612.5,-2485) -1322.5,-2195 -1017.5,-2195 -712.5,-1890 ; 712.5,-1890 1017.5,-2195 1322.5,-2195 v1(1612.5,-2485) 1902.5,-2195 2207.5,-2195 2512.5,-1890
  Bottom Layer w80: C21.2 -1684.07,-3351.57 v1(-1612.5,-3280) -1540.93,-3351.57 C22.1 ; -1642.5,-1770 -1612.5,-1740 v2(-1612.5,-1370) pad.9 ; R70.1 -1317.5,-4570 -1227.5,-4480 pad.2@327.5,-4480 ; pad.8 -212.5,-212.5 pad.2@0,0 ; pad.6@0,425 0,405 pad.2@0,0 ; pad.10 v2(1612.5,-1370) 1612.5,-1740 1582.5,-1770 ; pad.7 212.5,-217.5 0,-5 pad.2@0,0 ; C121.2 1540.93,-3351.57 v1(1612.5,-3280) ; KB1.3 1552.5,-4305 1612.5,-4245 v1(1612.5,-3280) ; C122.1 1684.07,-3351.57 v1(1612.5,-3280)
  Bottom Layer w90: -1623.6,-2690 -1612.5,-2690 -1601.4,-2690 ; 1601.4,-2690 1612.5,-2690 1623.6,-2690
  Bottom Layer w390: v1(-1612.5,-3280) -1612.5,-2690 v1(-1612.5,-2485) -1612.5,-1800 ; v1(1612.5,-3280) 1612.5,-2690 v1(1612.5,-2485) 1612.5,-1800
  Bottom Layer w500: -1817.5,-1760 -1807.5,-1770 -1642.5,-1770 ; -1612.5,-1800 -1642.5,-1770 ; -1407.5,-1770 -1642.5,-1770 ; 1407.5,-1760 1417.5,-1770 1582.5,-1770 ; 1612.5,-1800 1582.5,-1770 ; 1817.5,-1770 1582.5,-1770
NetC1_1: C1.1 D1.1 D11.2 D42.2 D43.2 Q4.2 Q9.2 R1.1 R16.1 | length 5597.7
  Top Layer w60: R16.1 -2670.33,-1750 C1.1@-2427.5,-1750 ; D1.1 -2667.5,-1510 C1.1@-2427.5,-1750 ; R1.1 -2427.5,-1772.83 C1.1@-2427.5,-1750 ; C1.1 -2359.04,-1750 C1.1@-2427.5,-1750 ; D11.2 -2030,-2467.5
  Top Layer w70: C1.1 -2339.34,-1750.74 -2339.34,-1750.91 -2339.34,-1751.01 -2339.34,-1751.22 -2339.29,-1755.85 Q9.2
  Top Layer w80: C1.1@-2357.69,-1737.69 -2357.81,-1738.77 -2357.99,-1740.39 -2358.41,-1744.25 -2358.8,-1747.87 C1.1@-2359.04,-1750 ; C1.1@-2352.9,-1724.28 -2353.44,-1726.53 C1.1@-2354.25,-1729.92 ; C1.1@-2345.55,-1713.18 -2346.74,-1716.41 -2348.51,-1721.25 -2348.94,-1722.43 -2356.71,-1743.64 C1.1@-2359.04,-1750 ; C1.1@-2359.04,-1750 -2357.84,-1745.29 C1.1@-2353.49,-1728.22 ; C1.1@-2359.04,-1750 -2356.9,-1743.88 C1.1@-2344.08,-1707.07 ; C1.1@-2359.04,-1750 -2357.98,-1745.56 -2354.84,-1732.39 C1.1@-2354.25,-1729.92 ; C1.1@-2354.25,-1729.92 C1.1@-2353.49,-1728.22 ; C1.1@-2354.25,-1729.92 D42.2 -2210,-1164.41 ; C1.1@-2353.49,-1728.22 -2214.41,-1181.74 -2210,-1164.41 ; C1.1@-2353.49,-1728.22 C1.1@-2344.08,-1707.07 ; C1.1@-2344.08,-1707.07 D43.2 -2155,-1164.41 ; C1.1@-2344.08,-1707.07 -2155,-1164.41 ; -2210,-1164.41 -2155,-1164.41
  Top Layer w100: C1.1 -2232.5,-1750 ; C1.1@-2260,-1755 -2237.5,-1755 -2232.5,-1750 ; Q4.2 -2030,-2467.5 -2082.5,-2415 -2082.5,-2380 -2232.1,-1751.69 -2232.5,-1750
NetC2_2: C2.2 D2.2 D10.1 D21.1 D24.1 Q5.2 Q7.2 R4.2 R15.2 | length 5479.8
  Top Layer w60: -1192.5,-2465 D10.1 ; C2.2 -865.96,-1750 C2.2@-802.5,-1750 ; R4.2 -802.5,-1767.83 C2.2@-802.5,-1750 ; R15.2 -554.67,-1750 C2.2@-802.5,-1750 ; D2.2 -562.5,-1510 C2.2@-802.5,-1750
  Top Layer w70: Q5.2 C2.2
  Top Layer w80: -1075,-1164.41 -1015,-1164.41 ; -1075,-1164.41 D24.1 C2.2 C2.2@-893,-1674.25 ; -1075,-1164.41 C2.2@-893,-1674.25 ; -1015,-1164.41 -1010.59,-1181.74 -897.79,-1624.95 ; -1015,-1164.41 D21.1 -897.79,-1624.95 ; -897.79,-1624.95 -867.16,-1745.29 -865.96,-1750 -868.19,-1743.77 C2.2@-893,-1674.25 ; -897.79,-1624.95 C2.2@-893,-1674.25
  Top Layer w100: Q7.2 -1192.5,-2465 -1142.5,-2415 -1142.5,-2380 -992.5,-1750 C2.2
NetC3_1: C3.1 C4.2 D33.1 D34.2 R9.1 R10.2 U2.2 VR1.3 | length 2055
  Top Layer w10: C4.2 -387.5,-3233.43 -387.5,-3495 -337.5,-3545 U2.2
  Top Layer w30: R10.2 R9.1
  Top Layer w40: D34.2 D33.1 -347.26,-3614.76 U2.2
  Bottom Layer w40: R9.1 -755.33,-3850 D34.2
  Bottom Layer w50: C3.1 -913.29,-3295.79 -962.5,-3345 VR1.3 -962.5,-3680 -817.5,-3825 R9.1
NetC3_2: C3.2 C10.2 C22.2 C24.2 D10.2 KC1.2 Q7.3 Q12.2 R9.2 R12.2 R17.2 U2.4 | length 5849.5
  Top Layer w40: C22.2 -1312.5,-3495.32 -1097.89,-3259.64 ; C22.2@-1332.5,-3530 R17.2@-1152.5,-3710 ; C22.2@-1322.5,-3551.57 -1322.5,-3637.17 ; Q12.2 R12.2 -1322.5,-3820 -1322.5,-3637.17 ; R9.2 -1322.5,-3637.17 ; C3.2 -1097.89,-3259.64 ; C24.2 -737.5,-3468.43 -737.5,-3305 -782.86,-3259.64 -1097.89,-3259.64
  Top Layer w50: C22.2@-1332.5,-3530 C22.2 C22.2@-1322.5,-3551.57 ; R17.2@-1152.5,-3710 R17.2
  Top Layer w60: Q7.3 -1202.5,-2800 -1127.5,-2875 D10.2
  Top Layer w80: KC1.2 -1470.02,-3655.94 C22.2
  Top Layer w120: C22.2 -1344.07,-2831.57 Q7.3 -1312.5,-3495.32 -1312.5,-3498.43 C22.2
  Bottom Layer w30: C24.2 -602.5,-3570 -537.5,-3505 -177.5,-3505 -137.5,-3545 U2.4
NetC4_1: C4.1 R22.2 U2.6 | length 970.2
  Top Layer w30: C4.1 -237.5,-3186.57 U2.6
  Top Layer w50: R22.2 -830.33,-2977.17 -767.5,-3040 -384.07,-3040 C4.1
NetC5_1: C5.1 R19.2 U1.6 | length 813.4
  Top Layer w50: U1.6 -2887.5,-3283.43 C5.1 -2619.07,-3015 -2442.5,-3015 -2404.67,-2977.17 R19.2
NetC5_2: C5.2 C16.2 D31.1 D32.2 R7.1 R8.2 U1.2 VR2.3 | length 2508.9
  Top Layer w30: D32.2 D31.1 -3097.5,-3755 -2987.5,-3645 U1.2 ; R7.1 R8.2
  Bottom Layer w10: U1.2@-2982.5,-3605 -2982.5,-3545 -3037.5,-3490 -3037.5,-3236.57 C5.2
  Bottom Layer w40: D32.2 -3087.26,-3920 -2832.5,-3920 -2782.5,-3870 -2489.67,-3870 R8.2
  Bottom Layer w50: R8.2 -2387.5,-3825 -2262.5,-3700 VR2.3 -2262.5,-3345 -2311.71,-3295.79 C16.2
NetC6_1: C6.1 C16.1 C21.1 C23.2 D11.1 KC1.1 Q4.3 Q8.3 R8.1 R24.1 U1.7 | length 5205.6
  Top Layer w30: C23.2@-2652.5,-3411.57 C23.2
  Top Layer w40: U1.7@-2982.5,-3305 -2982.5,-3395.79 -2966.71,-3411.57 C23.2@-2652.5,-3411.57 ; C23.2 -2500.57,-3259.64 -2127.11,-3259.64 ; C16.1 -2127.11,-3259.64 ; R8.1 -2090.33,-3812.83 -1907.5,-3630 ; R24.1 -2072.5,-3710 C21.1@-1907.5,-3545 ; Q8.3 -1907.5,-3630 ; C21.1@-1907.5,-3540 C21.1@-1907.5,-3545 ; -2127.11,-3259.64 -1912.5,-3495.32 C21.1 -1892.5,-3530 C21.1@-1907.5,-3545 ; -1907.5,-3630 C21.1@-1907.5,-3545
  Top Layer w60: D11.1 -2097.5,-2870 -2027.5,-2800 Q4.3
  Top Layer w80: C21.1@-1892.5,-3530 -1792.5,-3630 -1792.5,-4225 -1874.98,-4307.48 KC1.1
  Top Layer w120: C21.1@-1912.5,-3498.43 -1912.5,-3495.32 Q4.3 -1880.93,-2831.57 C21.1 C21.1@-1912.5,-3498.43
NetC7_1: C7.1 C11.1 D4.2 Q3.3 Q9.1 | length 1199.9
  Top Layer w40: C11.1 -2982.5,-2421.58 -2982.5,-2620 -2951.4,-2651.1 C7.1
  Top Layer w60: Q3.3 -2897.5,-2595 C7.1 -2728.6,-2651.1 -2662.5,-2585 D4.2 Q9.1
NetC7_2: C7.2 C11.2 D4.1 R3.1 | length 862.4
  Top Layer w40: C11.2 -3072.5,-2740 -3023.6,-2788.9 C7.2
  Top Layer w60: C7.2 -2718.6,-2788.9 -2662.5,-2845 D4.1 -2540.93,-2915.91 R3.1
NetC8_2: C8.2 C15.1 D33.2 D34.1 R21.1 U2.3 | length 1464.8
  Top Layer w30: C8.2 -488.29,-3804.21 C15.1
  Top Layer w40: C8.2 -322.5,-3965 -207.5,-3850 D34.1 D33.2 -122.5,-3755 -237.5,-3640 U2.3
  Top Layer w50: R21.1 -767.5,-4180 -657.5,-4070 -537.5,-4070 -488.29,-4020.79 C8.2
NetC9_1: C9.1 C12.1 D31.2 D32.1 R20.1 U1.3 | length 955
  Top Layer w30: U1.3 -2877.74,-3614.76 D31.2 ; C12.1 D31.2 ; C9.1 -2762.74,-3965 D32.1 D31.2
  Top Layer w50: C9.1 -2736.71,-4035.79 -2707.5,-4065 -2567.5,-4065 -2457.5,-4175 R20.1@-2439.67,-4175
NetC13_1: C13.1 C14.1 D6.2 R6.2 | length 856.8
  Top Layer w40: C13.1 -228.6,-2788.9 -152.5,-2712.8 C14.1
  Top Layer w60: R6.2 -659.07,-2915.91 D6.2 -562.5,-2845 -506.4,-2788.9 C13.1
NetC13_2: C13.2 C14.2 D6.1 Q5.1 Q10.3 | length 1236.9
  Top Layer w40: C13.2 -283.6,-2651.1 -237.5,-2605 -237.5,-2416.57 C14.2
  Top Layer w60: Q5.1 D6.1 -562.5,-2600 -511.4,-2651.1 C13.2 -327.5,-2615 Q10.3
NetC101_1: C101.1 D101.1 D111.2 D142.2 D143.2 Q104.2 Q109.2 R101.1 R116.1 | length 5512.7
  Top Layer w60: R116.1 554.67,-1750 C101.1@797.5,-1750 ; D101.1 557.5,-1510 C101.1@797.5,-1750 ; R101.1 797.5,-1772.83 C101.1@797.5,-1750 ; C101.1 865.96,-1750 C101.1@797.5,-1750 ; 1127.5,-2534.09 1195,-2467.5
  Top Layer w70: C101.1 Q109.2
  Top Layer w80: D142.2@949.8,-1165.28 D142.2@949.9,-1164.41 ; D142.2@949.94,-1164.1 D142.2@949.9,-1164.41 ; D143.2@1114.7,-1161.1 1114.53,-1161.59 1111.71,-1164.41 1060,-1164.41 ; D143.2 C101.1 C101.1@893.81,-1665.97 ; C101.1@893.81,-1665.97 867.91,-1744.12 865.96,-1750 867.16,-1745.29 897.79,-1624.95 ; C101.1@893.81,-1665.97 897.79,-1624.95 ; C101.1@893.81,-1665.97 1060,-1164.41 ; 897.79,-1624.95 1010.59,-1181.74 1015,-1164.41 ; 897.79,-1624.95 D142.2 D142.2@949.9,-1164.41 ; D142.2@949.9,-1164.41 1015,-1164.41 ; 1015,-1164.41 1060,-1164.41
  Top Layer w100: C101.1 992.5,-1750 1142.5,-2380 1142.5,-2415 1195,-2467.5 Q104.2
NetC102_2: C102.2 D102.2 D110.1 D121.1 D124.1 Q105.2 Q107.2 R104.2 R115.2 | length 5474.1
  Top Layer w60: 2032.5,-2465 2097.5,-2534.09 ; C102.2 2359.04,-1750 C102.2@2422.5,-1750 ; R104.2 2422.5,-1767.83 C102.2@2422.5,-1750 ; R115.2 2670.33,-1750 C102.2@2422.5,-1750 ; D102.2 2662.5,-1510 C102.2@2422.5,-1750
  Top Layer w70: Q105.2 C102.2
  Top Layer w80: 2160,-1164.41 2220,-1164.41 ; 2160,-1164.41 D124.1 C102.2 C102.2@2331.48,-1668.93 ; 2160,-1164.41 C102.2@2331.48,-1668.93 ; 2220,-1164.41 2223.34,-1178.46 2325.73,-1609.74 ; 2220,-1164.41 D121.1 2325.73,-1609.74 ; 2325.73,-1609.74 2357.98,-1745.58 2359.04,-1750 2357,-1744 C102.2@2331.48,-1668.93 ; 2325.73,-1609.74 C102.2@2331.48,-1668.93
  Top Layer w100: Q107.2 2032.5,-2465 2082.5,-2415 2082.5,-2380 2232.5,-1750 C102.2
NetC103_1: C103.1 C104.2 D133.1 D134.2 R109.1 R110.2 U102.2 VR101.3 | length 2055
  Top Layer w10: C104.2@2779.07,-3175 2837.5,-3233.43 2837.5,-3495 2887.5,-3545 U102.2
  Top Layer w30: R110.2 R109.1
  Top Layer w40: D134.2@2877.74,-3850 2877.74,-3614.76 U102.2
  Bottom Layer w40: R109.1 2469.67,-3850 D134.2@2877.74,-3850
  Bottom Layer w50: C103.1 2311.71,-3295.79 2262.5,-3345 VR101.3 2262.5,-3680 2407.5,-3825 R109.1
NetC103_2: C103.2 C110.2 C122.2 C124.2 D110.2 KB1.2 Q107.3 Q112.2 R109.2 R112.2 R117.2 U102.4 | length 5849.4
  Top Layer w40: C122.2 1912.5,-3495.32 2127.11,-3259.64 ; C122.2@1892.5,-3530 R117.2@2072.5,-3710 ; C122.2@1902.5,-3551.57 1902.5,-3637.17 ; Q112.2 R112.2 1902.5,-3820 1902.5,-3637.17 ; R109.2 1902.5,-3637.17 ; C103.2 2127.11,-3259.64 ; C124.2@2622.5,-3603.43 2487.5,-3468.43 2487.5,-3305 2442.14,-3259.64 2127.11,-3259.64
  Top Layer w50: C122.2@1892.5,-3530 C122.2 C122.2@1902.5,-3551.57 ; R117.2@2072.5,-3710 R117.2
  Top Layer w60: Q107.3 2022.5,-2800 2097.5,-2875 D110.2@2097.5,-2945.91
  Top Layer w80: KB1.2 1755.26,-3655.67 C122.2
  Top Layer w120: C122.2 1880.93,-2831.57 Q107.3 1912.5,-3495.32 1912.5,-3498.43 C122.2
  Bottom Layer w30: C124.2@2622.5,-3603.43 C124.2 2622.5,-3570 2687.5,-3505 3047.5,-3505 3087.5,-3545 U102.4
NetC104_1: C104.1 R122.2 U102.6 | length 970.2
  Top Layer w30: C104.1@2975.93,-3175 2987.5,-3186.57 U102.6
  Top Layer w50: R122.2 2394.67,-2977.17 2457.5,-3040 2840.93,-3040 C104.1@2975.93,-3175
NetC105_1: C105.1 R119.2 U101.6 | length 813.4
  Top Layer w50: U101.6 337.5,-3283.43 605.93,-3015 782.5,-3015 820.33,-2977.17 R119.2
NetC105_2: C105.2 C116.2 D131.1 D132.2 R107.1 R108.2 U101.2 VR102.3 | length 2508.9
  Top Layer w30: D132.2@67.74,-3850 67.74,-3755 127.5,-3755 237.5,-3645 U101.2 ; R107.1 R108.2
  Bottom Layer w10: U101.2@242.5,-3605 242.5,-3545 187.5,-3490 187.5,-3236.57 C105.2@249.07,-3175
  Bottom Layer w40: D132.2@67.74,-3850 137.74,-3920 392.5,-3920 442.5,-3870 735.33,-3870 R108.2
  Bottom Layer w50: R108.2 837.5,-3825 962.5,-3700 962.5,-3345 913.29,-3295.79 C116.2
NetC106_1: C106.1 C116.1 C121.1 C123.2 D111.1 KB1.1 Q104.3 Q108.3 R108.1 R124.1 U101.7 | length 5209.9
  Top Layer w30: C123.2@572.5,-3411.57 C123.2@577.5,-3406.57
  Top Layer w40: U101.7@242.5,-3305 242.5,-3395.79 258.29,-3411.57 C123.2@572.5,-3411.57 ; C123.2@577.5,-3406.57 724.43,-3259.64 1097.89,-3259.64 ; C116.1 1097.89,-3259.64 ; R108.1 1134.67,-3812.83 1317.5,-3630 ; R124.1 1152.5,-3710 C121.1@1317.5,-3545 ; Q108.3 1317.5,-3630 ; C121.1@1317.5,-3540 C121.1@1317.5,-3545 ; 1097.89,-3259.64 1312.5,-3495.32 C121.1 1332.5,-3530 C121.1@1317.5,-3545 ; 1317.5,-3630 C121.1@1317.5,-3545
  Top Layer w60: D111.1@1127.5,-2945.91 1127.5,-2870 1197.5,-2800 Q104.3
  Top Layer w80: C121.1@1332.5,-3530 1437.5,-3635 1437.5,-4230 1349.74,-4317.76 KB1.1
  Top Layer w120: C121.1@1312.5,-3498.43 1312.5,-3495.32 Q104.3 1344.07,-2831.57 C121.1 C121.1@1312.5,-3498.43
NetC107_1: C107.1 C111.1 D104.2 Q103.3 Q109.1 | length 1202.1
  Top Layer w40: C111.1 242.5,-2421.57 242.5,-2615 276.44,-2648.94 C107.1
  Top Layer w60: C107.1@321.53,-2650.18 322.12,-2650.27 327.17,-2651.05 C107.1@327.5,-2651.1 ; Q103.3 327.5,-2595 C107.1 C107.1@327.5,-2651.1 ; Q109.1 562.5,-2504.09 562.5,-2585 496.4,-2651.1 C107.1@327.5,-2651.1
NetC107_2: C107.2 C111.2 D104.1 R103.1 | length 851.6
  Top Layer w40: C111.2 152.5,-2715 224.23,-2786.73 C107.2
  Top Layer w60: C107.2@322.78,-2789.26 323.07,-2789.24 327.5,-2788.9 506.4,-2788.9 562.5,-2845 562.5,-2915.91 D104.1 684.07,-2915.91 R103.1
NetC108_2: C108.2 C115.1 D133.2 D134.1 R121.1 U102.3 | length 1464.8
  Top Layer w30: C108.2 2736.71,-3804.21 C115.1@2785.93,-3755
  Top Layer w40: C108.2 2902.5,-3965 3017.5,-3850 3157.26,-3850 3157.26,-3755 3102.5,-3755 2987.5,-3640 U102.3
  Top Layer w50: R121.1 2457.5,-4180 2567.5,-4070 2687.5,-4070 2736.71,-4020.79 C108.2
NetC109_1: C109.1 C112.1 D131.2 D132.1 R120.1 U101.3 | length 955
  Top Layer w30: U101.3 347.26,-3614.76 D131.2@347.26,-3755 ; C112.1@439.07,-3755 D131.2@347.26,-3755 ; C109.1 462.26,-3965 347.26,-3850 D131.2@347.26,-3755
  Top Layer w50: C109.1 488.29,-4035.79 517.5,-4065 657.5,-4065 767.5,-4175 R120.1@785.33,-4175
NetC113_1: C113.1 C114.1 D106.2 R106.2 | length 877.1
  Top Layer w40: C113.1 3025.77,-2791.73 3072.5,-2745 C114.1
  Top Layer w60: R106.2 2565.93,-2915.91 2662.5,-2915.91 2662.5,-2845 2718.6,-2788.9 2897.5,-2788.9 C113.1@2897.72,-2788.91
NetC113_2: C113.2 C114.2 D106.1 Q105.1 Q110.3 | length 1248
  Top Layer w40: C113.2 2953.56,-2653.94 2977.5,-2630 2977.5,-2426.57 C114.2
  Top Layer w60: Q105.1 2662.5,-2504.09 2662.5,-2600 2713.6,-2651.1 C113.2@2897.5,-2651.1 ; Q110.3 2897.5,-2615 C113.2@2897.5,-2651.1 ; C113.2@2898.58,-2650.93 C113.2@2897.5,-2651.1
NetCON11_1: CON11.1 D43.1 D44.2 | length 410.8
  Top Layer w100: D43.1@-2085.35,-720.09 -1893.71,-720.09 CON11.1
NetCON11_2: CON11.2 D41.2 D42.1 | length 1411.4
  Top Layer w100: CON11.2@-1967.5,-525 -2182.5,-525 -2282.5,-625 D42.1 -2282.5,-855 -2187.5,-950 -1737.5,-950 -1722.5,-935 D41.2
NetCON12_1: CON12.1 D23.1 D24.2 | length 389.8
  Top Layer w100: CON12.1 -1317.39,-715 D24.2@-1122.5,-715
NetCON12_2: CON12.2 D21.2 D22.1 | length 1102.3
  Top Layer w100: CON12.2 -1492.5,-586.26 -1492.5,-840 -1397.5,-935 -1022.5,-935 -942.5,-855 D21.2
NetCON111_1: CON111.1 D143.1 D144.2 | length 428
  Top Layer w100: D143.1@1122.5,-720.09 1331.29,-720.09 CON111.1
NetCON111_2: CON111.2 D141.2 D142.1 | length 1361.6
  Top Layer w100: CON111.2@1257.5,-525 1042.5,-525 942.5,-625 D142.1 942.5,-855 1037.5,-950 1402.5,-950 1502.5,-850 D141.2
NetCON112_1: CON112.1 D123.1 D124.2 | length 391.9
  Top Layer w100: CON112.1 1907.22,-716.68 D124.2@2102.5,-716.68
NetCON112_2: CON112.2 D121.2 D122.1 | length 1110.6
  Top Layer w100: CON112.2 1722.5,-596.26 D122.1 1722.5,-830 1827.5,-935 2202.5,-935 2282.5,-855 D121.2
NetD1_2: D1.2 Q1.1 | length 171.8
  Top Layer w60: Q1.1 D1.2
NetD2_1: D2.1 Q2.1 | length 152.1
  Top Layer w60: D2.1 Q2.1
NetD5_6: D5.6 Q8.2 R11.2 R20.2 | length 1094.2
  Top Layer w30: D5.6 -2212.5,-4055 -2167.5,-4010 -2012.5,-4010 -1947.5,-4075 Q8.2
  Bottom Layer w40: R11.2 -2402.5,-4075 -2212.5,-4265 D5.6 -2102.5,-4180 R20.2
NetD7_4: D7.4 Q12.3 R21.2 | length 865.6
  Top Layer w40: Q12.3 R21.2 -1187.5,-4227.83 -1187.5,-4345 -1147.5,-4385 -972.5,-4385 -812.5,-4545 D7.4
NetD8_2: D8.2 Q13.2 R15.1 | length 529.1
  Top Layer w50: R15.1 -402.5,-2120 D8.2
  Top Layer w60: R15.1 -482.5,-1975 -427.5,-1920 Q13.2
NetD9_1: D9.1 Q14.2 R16.2 | length 473.5
  Top Layer w50: D9.1 R16.2
  Top Layer w60: Q14.2 -2797.5,-1920 -2742.5,-1975 R16.2
NetD101_2: D101.2 Q101.1 | length 171.8
  Top Layer w60: Q101.1 D101.2
NetD102_1: D102.1 Q102.1 | length 152.1
  Top Layer w60: D102.1 Q102.1
NetD105_6: D105.6 Q108.2 R111.2 R120.2 | length 1094.2
  Top Layer w30: D105.6 1012.5,-4055 1057.5,-4010 1212.5,-4010 1277.5,-4075 Q108.2
  Bottom Layer w40: R111.2 822.5,-4075 1012.5,-4265 D105.6 1122.5,-4180 R120.2
NetD107_4: D107.4 Q112.3 R121.2 | length 865.6
  Top Layer w40: Q112.3 R121.2 2037.5,-4227.83 2037.5,-4345 2077.5,-4385 2252.5,-4385 2412.5,-4545 D107.4
NetD108_2: D108.2 Q113.2 R115.1 | length 529.1
  Top Layer w50: R115.1 2822.5,-2120 D108.2
  Top Layer w60: R115.1 2742.5,-1975 2797.5,-1920 Q113.2
NetD109_1: D109.1 Q114.2 R116.2 | length 473.5
  Top Layer w50: D109.1 R116.2
  Top Layer w60: Q114.2 427.5,-1920 482.5,-1975 R116.2
NetKC1_3: KC1.3 R70.2 | length 356.6
  Bottom Layer w80: R70.2 -1782.5,-4570 -1672.5,-4460 KC1.3
NetQ1_2: Q1.2 Q1.3 Q3.2 Q14.3 | length 1008.5
  Top Layer w60: Q1.2 Q1.3 Q14.3 -3052.5,-1820 -3102.5,-1870 -3102.5,-2150 -2842.5,-2410 Q3.2
NetQ2_2: Q2.2 Q2.3 Q10.2 Q13.3 | length 1044.8
  Top Layer w60: Q10.2 -387.5,-2410 -82.5,-2105 -82.5,-1855 -117.5,-1820 Q13.3 Q2.3 Q2.2
NetQ3_1: Q3.1 R1.2 | length 200.9
  Top Layer w60: Q3.1 -2810.34,-2312.17 R1.2
NetQ4_1: Q4.1 Q9.3 | length 320.6
  Bottom Layer w80: Q9.3 Q4.1
NetQ5_3: Q5.3 Q7.1 | length 321.4
  Bottom Layer w80: Q7.1 Q5.3
NetQ6_1: Q6.1 R3.2 | length 271.4
  Top Layer w60: R3.2 -2537.5,-2620 -2437.5,-2720 Q6.1
NetQ6_2: Q6.2 R19.1 | length 141.2
  Top Layer w60: Q6.2 -2225.33,-2620 R19.1
NetQ8_1: Q8.1 R11.1 | length 224.3
  Top Layer w30: R11.1 -2052.5,-4075 -1952.5,-4175 Q8.1
NetQ10_1: Q10.1 R4.1 | length 180.9
  Top Layer w60: R4.1 -434.67,-2312.17 Q10.1
NetQ11_1: Q11.1 R6.1 | length 228.6
  Top Layer w60: Q11.1 -732.5,-2720 -687.5,-2675 R6.1
NetQ11_2: Q11.2 R22.1 | length 191.2
  Top Layer w60: R22.1 -999.67,-2620 Q11.2
NetQ12_1: Q12.1 R12.1 | length 573.6
  Bottom Layer w30: Q12.1 -1272.5,-3975 -1242.5,-4005 -855.33,-4005 R12.1
NetQ13_1: Q13.1 R5.2 | length 180.4
  Top Layer w60: R5.2 Q13.1
NetQ14_1: Q14.1 R2.1 | length 130.6
  Top Layer w60: Q14.1 R2.1
NetQ101_2: Q101.2 Q101.3 Q103.2 Q114.3 | length 1008.5
  Top Layer w60: Q101.2 Q101.3 Q114.3 172.5,-1820 122.5,-1870 122.5,-2150 382.5,-2410 Q103.2
NetQ102_2: Q102.2 Q102.3 Q110.2 Q113.3 | length 1044.8
  Top Layer w60: Q110.2 2837.5,-2410 3142.5,-2105 3142.5,-1855 3107.5,-1820 Q113.3 Q102.3 Q102.2
NetQ103_1: Q103.1 R101.2 | length 200.9
  Top Layer w60: Q103.1 414.66,-2312.17 R101.2
NetQ104_1: Q104.1 Q109.3 | length 320.6
  Bottom Layer w80: Q109.3 Q104.1
NetQ105_3: Q105.3 Q107.1 | length 321.4
  Bottom Layer w80: Q107.1 Q105.3
NetQ106_1: Q106.1 R103.2 | length 271.4
  Top Layer w60: R103.2 687.5,-2620 787.5,-2720 Q106.1
NetQ106_2: Q106.2 R119.1 | length 141.2
  Top Layer w60: Q106.2 999.67,-2620 R119.1
NetQ108_1: Q108.1 R111.1 | length 224.3
  Top Layer w30: R111.1 1172.5,-4075 1272.5,-4175 Q108.1
NetQ110_1: Q110.1 R104.1 | length 180.9
  Top Layer w60: R104.1 2790.33,-2312.17 Q110.1
NetQ111_1: Q111.1 R106.1 | length 228.6
  Top Layer w60: Q111.1 2492.5,-2720 2537.5,-2675 R106.1
NetQ111_2: Q111.2 R122.1 | length 191.2
  Top Layer w60: R122.1 2225.33,-2620 Q111.2
NetQ112_1: Q112.1 R112.1 | length 573.6
  Bottom Layer w30: Q112.1 1952.5,-3975 1982.5,-4005 2369.67,-4005 R112.1
NetQ113_1: Q113.1 R105.2 | length 180.4
  Top Layer w60: R105.2 Q113.1
NetQ114_1: Q114.1 R102.1 | length 130.6
  Top Layer w60: Q114.1 R102.1
NetR17_1: R17.1 VR1.2 | length 459.2
  Top Layer w30: VR1.2 -1062.5,-3500 -852.5,-3710 R17.1
NetR18_2: R18.2 VR1.1 | length 224
  Top Layer w30: VR1.1 -862.5,-3517.83 R18.2
NetR23_1: R23.1 VR2.2 | length 224
  Top Layer w30: R23.1 -2362.5,-3517.83 VR2.2
NetR24_2: R24.2 VR2.1 | length 459.2
  Top Layer w30: R24.2 -2372.5,-3710 -2162.5,-3500 VR2.1
NetR117_1: R117.1 VR101.2 | length 459.2
  Top Layer w30: VR101.2 2162.5,-3500 2372.5,-3710 R117.1
NetR118_2: R118.2 VR101.1 | length 224
  Top Layer w30: VR101.1 2362.5,-3517.83 R118.2
NetR123_1: R123.1 VR102.2 | length 224
  Top Layer w30: R123.1 862.5,-3517.83 VR102.2
NetR124_2: R124.2 VR102.1 | length 459.2
  Top Layer w30: R124.2 852.5,-3710 1062.5,-3500 VR102.1
pads on no net: D5.1 D5.2 D5.3 D5.5 D5.7 D5.8 D7.1 D7.2 D7.3 D7.5 D7.7 D7.8 D105.1 D105.2 D105.3 D105.5 D105.7 D105.8 D107.1 D107.2 D107.3 D107.5 D107.7 D107.8 TRS1.1 TRS2.1 U1.1 U1.5 U1.8 U2.1 U2.5 U2.8 U101.1 U101.5 U101.8 U102.1 U102.5 U102.8
copper on no net: | length 600
  Top Layer w100: -150,585 150,585 ; -150,765 150,765

## Silkscreen, mask and mechanical layers (free items; w line width, h text height)
Top Overlay:
  text "AC IN" at -140,970 h60
  text "~" at -30,800 h90
  text "PEG" at -72.5,170 h60
  text "PEG" at -442.5,-1080 h60
  text "PEG" at 302.5,-1080 h60
  text "PEG" at 1560,-1480 h40
  text "PEG" at -1660,-1500 h40
  text "VAS PWR" at -1850,-4260 h60
  text "+" at -2047.5,-4475 h80
  text "-" at -1347.5,-4485 h80
  text "+" at 1177.5,-4545 h80
  text "-" at 1857.5,-4555 h80
  text "Buff PWR" at 1355,-4595 h60
Mechanical 1:
  the board outline again, w10
Drill Drawing:
  the board outline again, w10